# Altium PCB buck&boost.PcbDoc
Units mil, origin at the board's own origin, x right, y up, seen from the top; angles counter-clockwise.
Board outline 940.03 x 605.03 mil, 2 copper layers (Top Layer, Bottom Layer); 9 components, 7 nets, 26 pads, 30 vias.
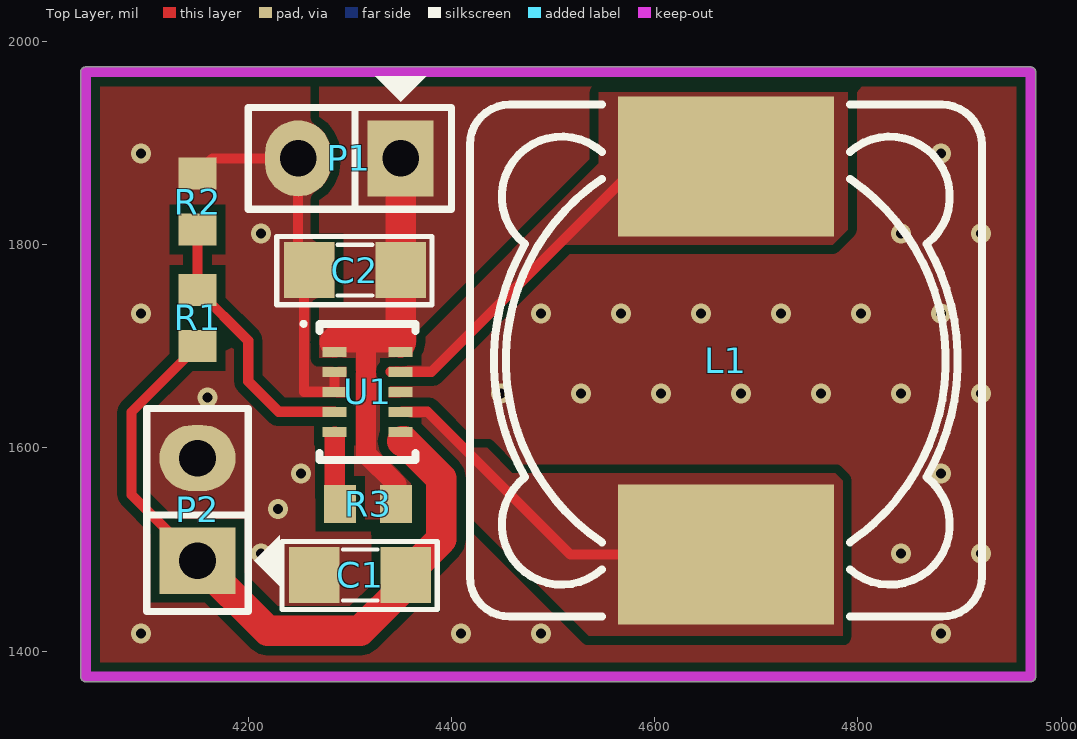
[diagram p0: Top Layer view]
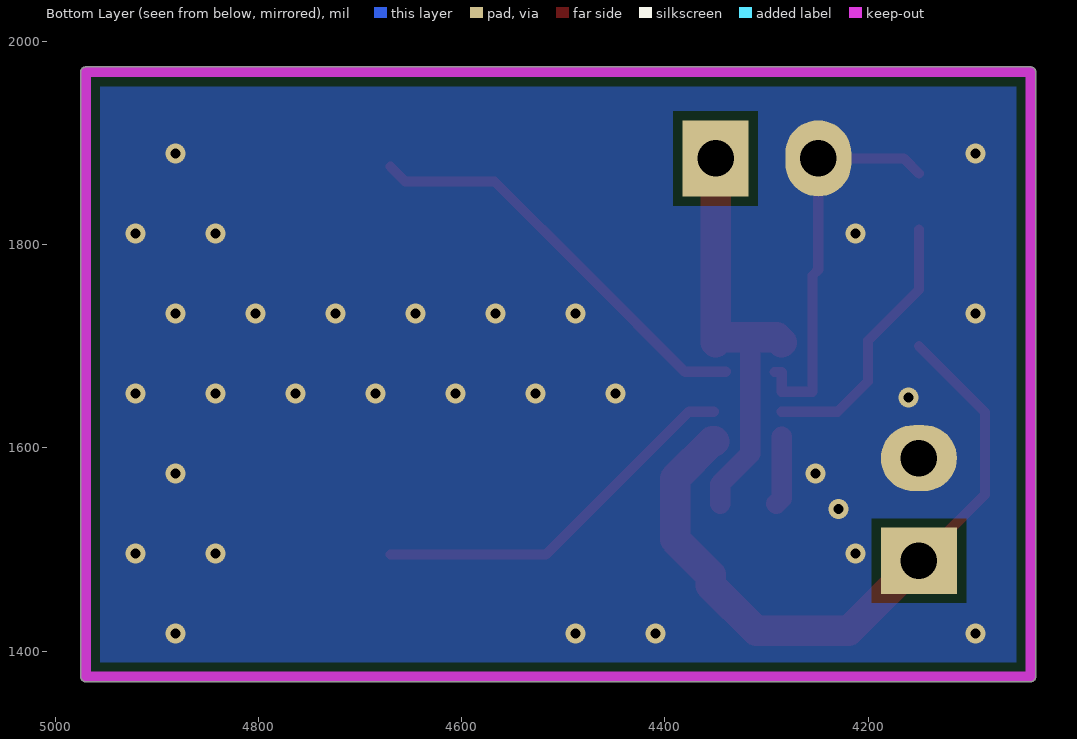
[diagram p1: Bottom Layer view, seen from below]
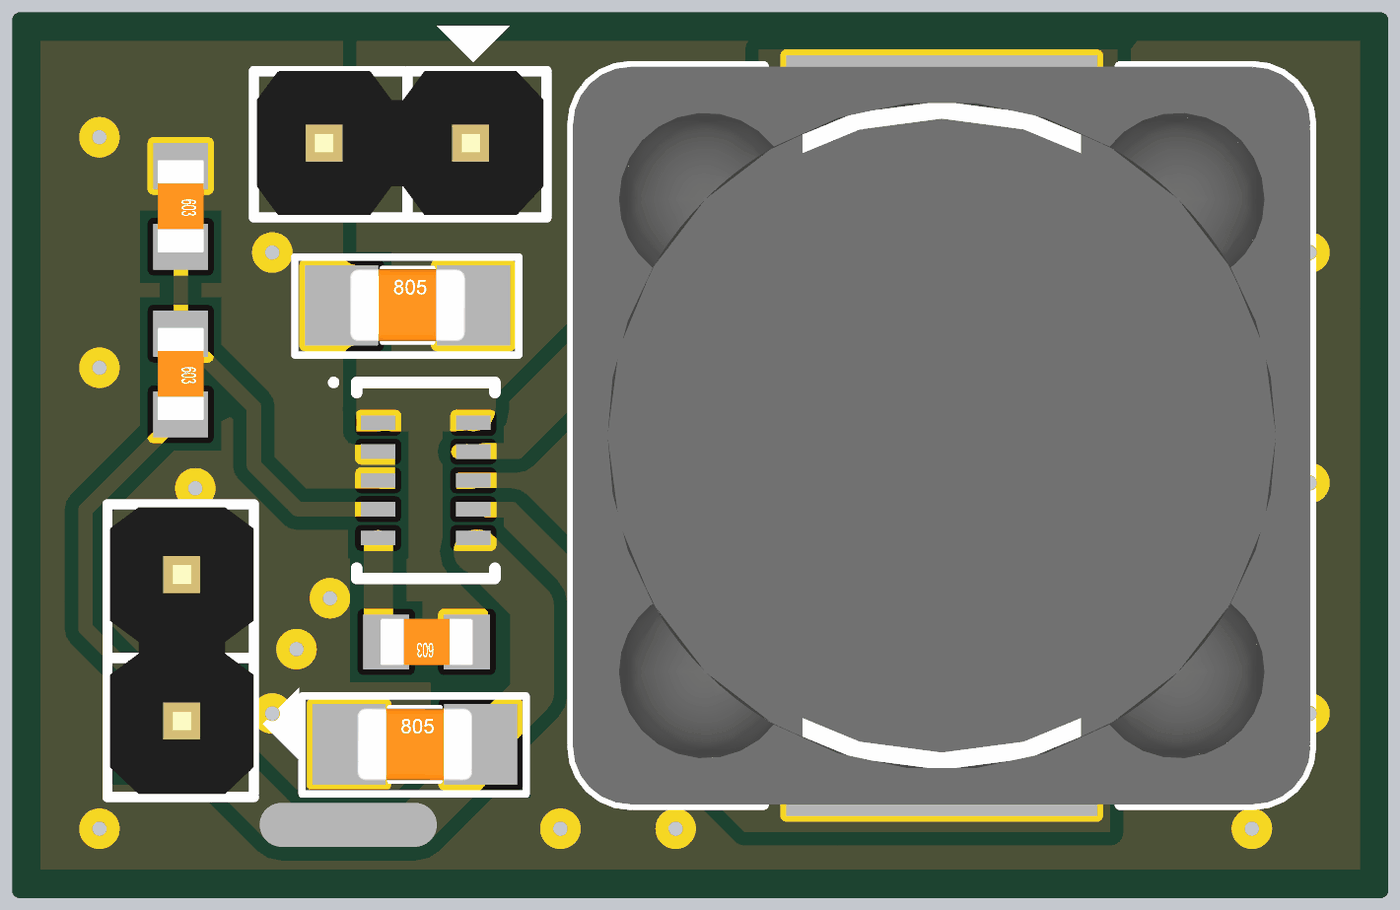
[diagram p2: 3D render of the assembled board from above, using the file's embedded part models]

## Layer stack, top to bottom
Top Solder: solder mask 0.4, Solder Resist, Dk 3.5
Top Layer: signal copper 1.4
Dielectric 1: dielectric 12.6, FR-4, Dk 4.8
Bottom Layer: signal copper 1.4
Bottom Solder: solder mask 0.4, Solder Resist, Dk 3.5

## Board outline
4034.99,1375 ccw(c4040,1375) 4040,1369.98 4970,1369.98 ccw(c4970,1375) 4975.02,1375 4975.02,1970 ccw(c4970,1970) 4970,1975.02 4040.03,1975.01 ccw(c4040,1970) 4034.99,1970

## Design rules (kind name [scope] priority, off if disabled: settings)
Clearance "Stitching GND" [IsStitchingVia and InNet('GND') vs (IsVia and (Not IsStitchingVia)) Or IsPad] p1: gap=5 ignorepadtopadclearanceinfootprint=FALSE
Clearance [All] p2: gap=9 ignorepadtopadclearanceinfootprint=FALSE
PlaneConnect [All] p1: planeconnectstyle=Direct reliefexpansion=20 reliefentries=4 reliefconductorwidth=10 reliefairgap=10
PolygonConnect [All] p1: connectstyle=Direct reliefconductorwidth=10 reliefentries=4 polygonreliefangle="90 Angle" airgapwidth=10
RoutingVias [All] p1: holewidth=7.87 width=15.75 viastyle="Through Hole" minholewidth=7.87 minwidth=15.75 maxholewidth=28 maxwidth=50
SolderMaskExpansion [All] p1: expansion=4
Width [All] p1: maxlimit=30 minlimit=10 preferedwidth=20
29 further rules are at their usual default settings.

## Components (designator, comment, footprint, x,y, rotation, side; value= is the part's Value field where it differs from the comment)
C1 "Cap Non-Pol SMD" CAP-SM-0805 4265,1475 r0 top value=22uF/50V
C2 "Cap Non-Pol SMD" CAP-SM-0805 4260,1775 r0 top value=10uF/50V
L1 "Inductor" "INDUCTOR 12.5x12.5" 4670,1685.94 r270 top value=0.47uH/4A
P1 "Header 2" JP2 4350,1885 r180 top
P2 "Header 2" JP2 4150,1489 r90 top
R1 "RESISTOR SMD" RES-SM-0603 4150,1755 r270 top value=511K
R2 "RESISTOR SMD" RES-SM-0603 4150,1869.56 r270 top value=91K
R3 "RESISTOR SMD" RES-SM-0603 4345,1545 r180 top value=100K
U1 "TPS63802" TPS63802 4317.48,1655.31 r0 top

## Footprints (in the part's own frame and the unit in brackets; to place one, negate y for a bottom-side part, rotate by r counter-clockwise, add the part's x,y. Pads: shape width x height; smd on the part's side, far side on the other; paste and mask are expansions set on the pad)
CAP-SM-0805 [mil]
  rect 50x55 smd: 1(0,0) 2(90,0)
  silkscreen extent -32,-34 121,33, body extent 6,-25 84,25, height 31
"INDUCTOR 12.5x12.5" [mm] "SMD Inductor  Body Width 12.5mm Body Lenght 12.5mm Height 8mm"
  rect 3.5x5.4 smd: 1(-4.85,0) 2(4.85,0)
  silkscreen extent -6.4,-6.4 6.4,6.4, body extent -6.4,-6.4 6.4,6.4, height 8
JP2 [mil]
  rect 65x75 hole 36: 1(0,0)
  oval 65x75 hole 36: 2(101,0)
  silkscreen extent -50,-81 150,50, body extent -48,-50 148,48, height 323
RES-SM-0603 [mm]
  rect 0.8x0.95 smd: 1(-0.014,0) 2(1.386,0)
  body extent -0.11,-0.4 1.49,0.4, height 0.3
TPS63802 [mm] "SON, 10-Leads, Body 3,00x2,00mm, Pitch 0,50mm, IPC Medium Density"
  rect 0.6x0.25 smd: 1(-0.825,1) 2(-0.825,0.5) 3(-0.825,0) 4(-0.825,-0.5) 5(-0.825,-1) 6(0.825,-1) 7(0.825,-0.5) 8(0.825,0) 9(0.825,0.5) 10(0.825,1)
  silkscreen extent -1.65,-1.7 1.2,1.75, body extent -1.05,-1.55 1.05,1.55, height 1

## Part data
C1 C2: "Capacitor"
P1 P2: "Header, 2-Pin", LatestRevisionDate=17-Jul-2002, LatestRevisionNote="Re-released for DXP Platform.", Publisher="Altium Limited"
R1 R2 R3: "Resistor"
U1: "SMD"

## Via types
v1: diameter 19.68, hole 9.84, Top Layer to Bottom Layer, 30 vias

## Nets (pads, with @x,y where several pads share a name; then routed paths per layer and width w, separated by ;. In a path a pad name is that pad's centre, name@x,y a point inside that pad or via, vN(x,y) a via of type N, cw(c..) or ccw(c..) an arc to the next point about the centre after c; other vN are vias at no path point)
GND: C1.1 C2.1 P1.2 P2.2 R2.1 U1.2 U1.3 U1.8 | length 393.9
  Top Layer w10: R2.1 4164.88,1885 P1.2 4249,1775.37 4254.69,1769.69 4254.69,1655.31 U1.3 4285,1674.92 U1.2@4291.81,1674.92
  other v1: 4094.49,1417.32 4409.45,1417.32 4488.19,1417.32 4881.89,1417.32 4212.6,1496.06 4842.52,1496.06 4921.26,1496.06 4229.14,1540 4251.97,1574.8 4881.89,1574.8 4160,1649.9 4448.82,1653.54 4527.56,1653.54 4606.3,1653.54 4685.04,1653.54 4763.78,1653.54 4842.52,1653.54 4921.26,1653.54 4094.49,1732.28 4488.19,1732.28 4566.93,1732.28 4645.67,1732.28 4724.41,1732.28 4803.15,1732.28 4881.89,1732.28 4212.6,1811.02 4842.52,1811.02 4921.26,1811.02 4094.49,1889.76 4881.89,1889.76
NetC1_2: C1.2 P2.1 R1.2 U1.6 | length 690.7
  Top Layer w10: P2.1 4085,1554 4085,1635.44 R1.2
  Top Layer w30: P2.1 4219,1420 4310,1420 4355,1465 C1.2 4390,1510 4390,1570 4353.29,1606.71 4351.52,1606.71
NetC2_2: C2.2 P1.1 R3.1 U1.1 U1.10 | length 427.2
  Top Layer w20: 4317.52,1708.96 4315.81,1707.25 4315.81,1594.33 4345.56,1564.59 R3.1
  Top Layer w30: 4285,1703.92 4290.04,1708.96 4317.52,1708.96 4345,1708.96 4350,1703.96 C2.2 P1.1
NetL1_1: L1.1 U1.9 | length 413.8
  Top Layer w10: U1.9@4339.81,1674.96 4380.28,1674.96 4475,1769.69 4567.66,1862.34 4655.45,1862.34 L1.1
NetL1_2: L1.2 U1.7 | length 376.8
  Top Layer w10: U1.7@4351.52,1635.71 4376.38,1635.71 4517.09,1495 L1.2
NetR1_1: R1.1 R2.2 U1.4 | length 267.5
  Top Layer w10: R2.2 R1.1 4200,1705.56 4200,1665.63 4230,1635.63 U1.4
NetR3_2: R3.2 U1.5 | length 68.6
  Top Layer w20: U1.5@4285,1611.33 4285,1550.44 R3.2

## Polygon pours and split planes (outlines as drawn)
GND on Top Layer "Top Layer-No Net" (solid, pour order 105): 4034.99,1375 ccw(c4040,1375) 4040,1369.98 4970,1369.98 ccw(c4970,1375) 4975.02,1375 4975.02,1970 ccw(c4970,1970) 4970,1975.02 4040.03,1975.01 ccw(c4040,1970) 4034.99,1970
NetC2_2 on Top Layer "Top Layer-NetC2_2" (solid, pour order 103): 4270,1970 4545,1970 4545,1870.12 4360.04,1685.16 4360.04,1530.15 4359.89,1530 4280,1530 4280,1583.39 4270,1593.39
NetL1_2 on Top Layer "Top Layer-NetL1_2" (solid, pour order 101): 4349.96,1635.63 4376.3,1635.63 4376.38,1635.71 4410,1602.09 4410,1600 4435,1600 4460,1575 4777.5,1575 4785,1567.5 4785,1415 4535,1415 4349.96,1600.04
GND on Top Layer "Top Layer-NetL1_2 1" (solid, pour order 99): 4340,1635.71
NetL1_1 on Top Layer "Top Layer-NetL1_1" (solid, pour order 95): 4339.81,1674.96 4380.28,1674.96 4435.31,1730 4505.31,1800 4775,1800 4790,1815 4790,1950 4545,1950 4545,1880.15
GND on Bottom Layer "Top Layer-No Net1" (solid, pour order 107): 4034.99,1375 ccw(c4040,1375) 4040,1369.98 4970,1369.98 ccw(c4970,1375) 4975.02,1375 4975.02,1970 ccw(c4970,1970) 4970,1975.02 4040.03,1975.01 ccw(c4040,1970) 4034.99,1970

## Keep-outs
Top Layer:
  lines w10: 4040,1375 4040,1970 4970,1970 4970,1375 4040,1375
Bottom Layer:
  lines w10: 4040,1375 4040,1970 4970,1970 4970,1375 4040,1375